# EAGLE board LabAccessDC (EAGLE 9.2.1)
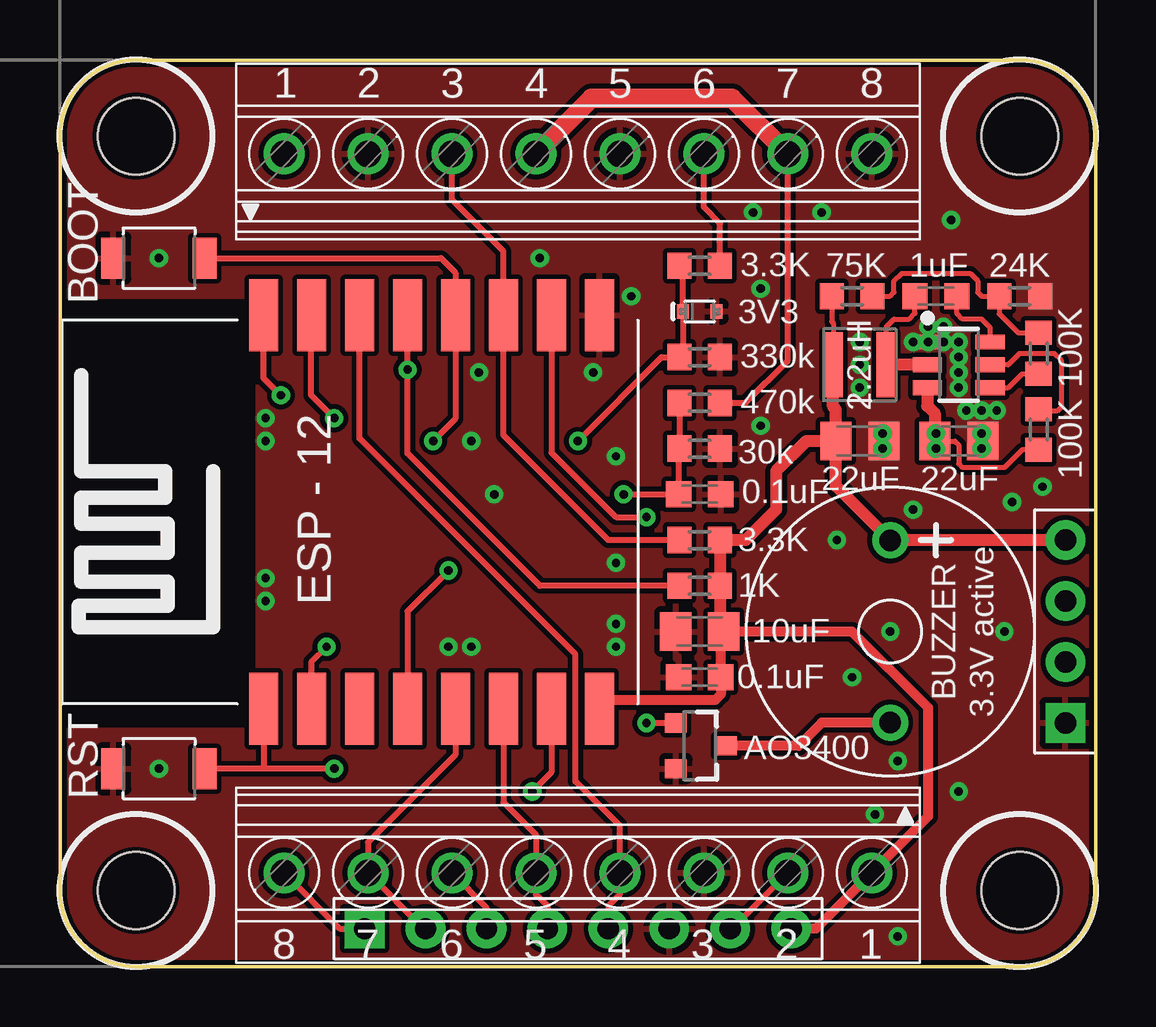
[diagram p0: board, top side]
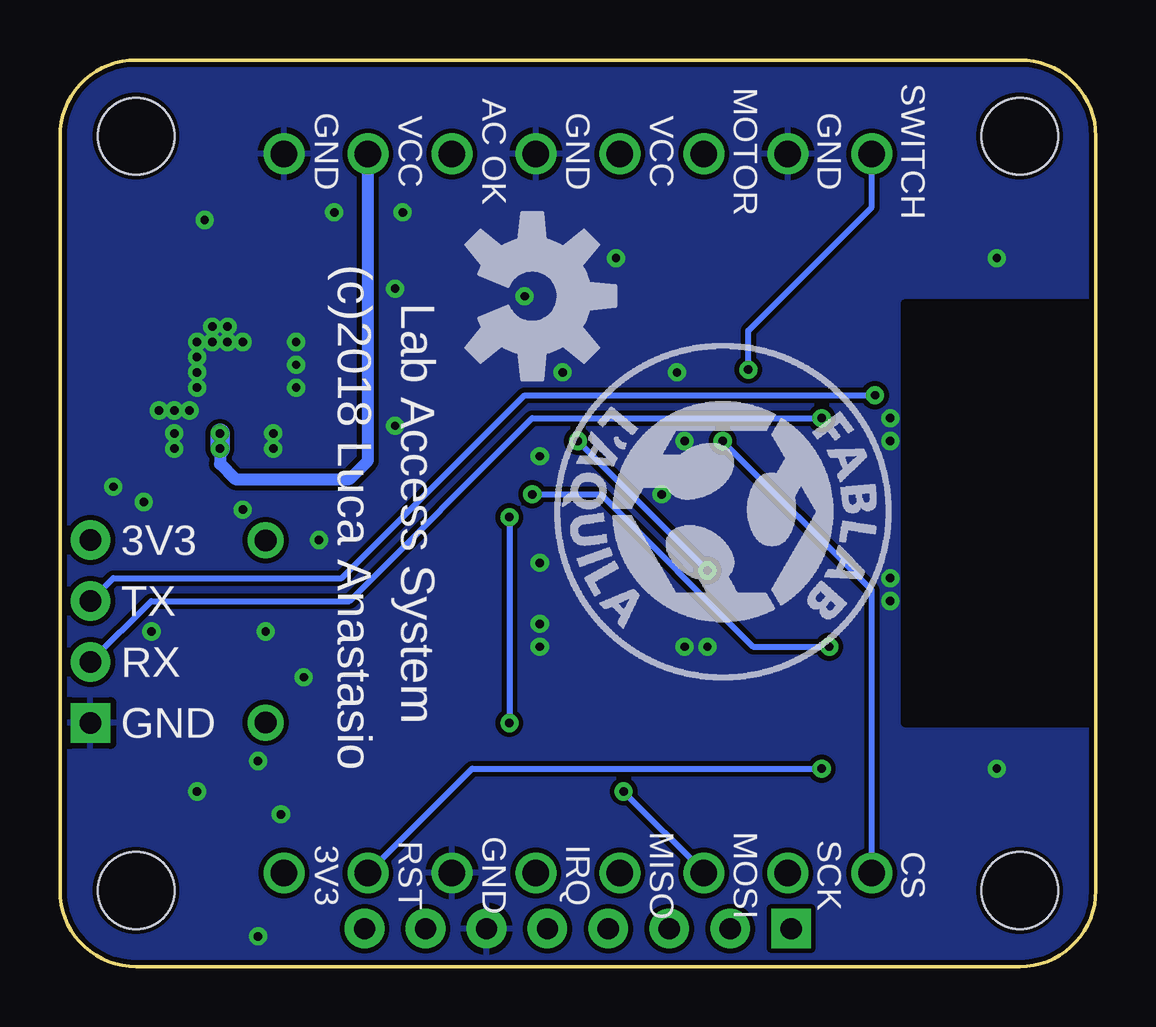
[diagram p1: board, bottom side, seen from below]

Size 43.18 x 37.78 mm. Coordinates in mm from the lower left corner, seen from the top.
Outline: 3.17,0 arc-90 0,3.17 0,34.61 arc-90 3.17,37.78 40.01,37.78 arc-90 43.18,34.61 43.18,3.17 arc-90 40.01,0 3.17,0
Copper layers (1*16): Top 0.035mm / dielectric 1.5mm / Bottom 0.035mm
Design rules "default *": minimum track width 6mil, minimum drill 0.35mm, track to track 6mil, track to pad 6mil, pad to pad 6mil, via to via 6mil, smd to smd 6mil, copper to edge 6mil, drill to drill 6mil, minimum pad ring 10mil, minimum via ring 8mil, stop-mask expansion 4mil, vias tented up to drill 20mil, thermal gap 10mil
Holes 3.2 mm at 3.17,3.17 40.01,3.17 3.17,34.61 40.01,34.61
tRestrict: area 0,10.2 to 7.9,27.6
bRestrict: area 0,10.2 to 7.9,27.6

## Footprints (pad centres in the part's own frame; a part is rotated, then mirrored left to right if it is on the bottom)
BZ2-7.6-D12.0XH6.5MM = drill 0.9 pad 1.5: + -3.8,0; - 3.8,0
C0603K = smd 1.05 x 1.08: 1 -0.875,0; 2 0.875,0
C0805K = smd 1.3 x 1.6: 1 -1,0; 2 1,0
SPARKFUN-DISCRETESEMI_SOD-523 = smd 0.5 x 0.6: A -0.7,0; C 0.7,0
H4-2.54 = drill 0.889 pad 1.651 square: 1 0,3.81 | drill 0.889 pad 1.651: 2 0,1.27; 3 0,-1.27; 4 0,-3.81
H8-2.54 = drill 0.889 pad 1.651 square: 1 0,8.89 | drill 0.889 pad 1.651: 2 0,6.35; 3 0,3.81; 4 0,1.27; 5 0,-1.27; 6 0,-3.81; 7 0,-6.35; 8 0,-8.89
TSOT-23-6 = smd 1.22 x 0.62: 1 -1.31,0.95; 2 -1.31,0; 3 -1.31,-0.95; 4 1.31,-0.95; 5 1.31,0; 6 1.31,0.95
INDUCTOR-NR3015 = smd 0.8 x 2.7: 1 -1.1,0; 2 1.1,0
SOT23-3 = smd 0.8 x 0.9: 1 -0.95,-1; 2 0.95,-1; 3 0,1.1
R0603 = smd 1 x 1.1: 1 -0.85,0; 2 0.85,0
SW2-2.6-3.0X2.5X1.2+0.4MM = smd 1 x 1.7: 1 -1.9,0; 2 1.9,0
ESP12-SMD = smd 3 x 1.2: ADC -8.3,3.8; CH_PD -8.3,1.8; GND 8.1,-8.2; GPIO0 8.1,-2.2; GPIO2 8.1,-4.2; GPIO4 8.1,1.8; GPIO5 8.1,-0.2; GPIO12 -8.3,-4.2; GPIO13 -8.3,-6.2; GPIO14 -8.3,-2.2; GPIO15 8.1,-6.2; GPIO16 -8.3,-0.2; RESET -8.3,5.8; RXD0 8.1,3.8; TXD0 8.1,5.8; VCC -8.3,-8.2
1751303 = drill 1.1 pad 1.7: 1 -12.25,-0.1; 2 -8.75,-0.1; 3 -5.25,-0.1; 4 -1.75,-0.1; 5 1.75,-0.1; 6 5.25,-0.1; 7 8.75,-0.1; 8 12.25,-0.1

## Placement (x,y rotation side)
BUZZER  3.3V active  [BZ2-7.6-D12.0XH6.5MM]  34.61,13.97 270 top
C1  0.1uF  [C0603K]  26.67,19.68 180 top
C2  10uF  [C0805K]  26.67,13.97 0 top
C3  22uF  [C0805K]  33.34,21.91 0 top
C4  1uF  [C0603K]  36.51,27.94 180 top
C6  0.1uF  [C0603K]  26.67,12.06 0 top
C7  22uF  [C0805K]  37.47,21.91 0 top
D3  3.3V  [SPARKFUN-DISCRETESEMI_SOD-523]  26.67,27.3 180 top
J1  4p-2.54  [H4-2.54]  41.91,13.97 180 top
JP1  8p-2.54  [H8-2.54]  21.59,1.59 90 top
MP1470  MP1470GJ  [TSOT-23-6]  37.47,25.08 0 top
NR3015T2R2M  2.2uH  [INDUCTOR-NR3015]  33.34,25.08 180 top
Q1  AO3400  [SOT23-3]  26.67,9.21 270 top
R3  3.3K  [R0603]  26.67,17.78 180 top
R4  3.3K  [R0603]  26.67,29.21 0 top
R5  330k  [R0603]  26.67,25.4 0 top
R6  1K  [R0603]  26.67,15.88 180 top
R8  EN  [R0603]  40.8,22.38 90 top
R9  24k  [R0603]  40.01,27.94 180 top
R10  75k  [R0603]  33.02,27.94 180 top
R11  FB  [R0603]  40.8,25.56 90 top
R12  30k  [R0603]  26.67,21.59 0 top
R13  470k  [R0603]  26.67,23.5 180 top
SW1  B3U-1000P-2P-SMD  [SW2-2.6-3.0X2.5X1.2+0.4MM]  4.13,29.53 0 top
SW2  B3U-1000P-2P-SMD  [SW2-2.6-3.0X2.5X1.2+0.4MM]  4.13,8.26 0 top
U1  [ESP12-SMD]  14.29,19.05 90 top
U$3  [OSHW-LOGO-L]  23.5,27.94 270 bottom
X2  1751303  [1751303]  21.59,33.97 0 top
X3  1751303  [1751303]  21.59,3.81 180 top

## Library data of the parts
BUZZER = Seeed-Connector; MPN: KS-12065D03YA
C1-C4 C6 C7 = rcl; SPICEPREFIX: C
D3 = LabAccessBoard; PROD_ID: DIO-11018; SPICEPREFIX: D; VOLTAGE: 3V3
J1 = Seeed-Connector; MPN: P125-1104A0BS116A1
JP1 = Seeed-Connector; MPN: P125-1108A1BS116A1
MP1470 = MP1470
NR3015T2R2M = Particle
Q1 = SparkFun-DiscreteSemi; PROD_ID: TRANS-12988
R3 R6 = resistor
R4 R5 R8-R13 = rcl; SPICEPREFIX: R
SW1 SW2 = Seeed-Switch; MPN: B3U-1000P-2P-SMD
U1 = esp8266modules
U$3 = SparkFun-Aesthetics
X2 X3 = con-phoenix-350; OC_FARNELL: unknown; OC_NEWARK: unknown

## Nets
+3V3: BUZZER.+ C2.2 C3.1 C6.2 J1.4 JP1.8 NR3015T2R2M.2 R3.1 R6.1 R10.2 U1.VCC X3.1
AC_OK: R4.2 X2.6
AC_SNS: D3.C R4.1 R5.1 U1.GPIO16
ADC: C1.2 R12.1 R13.2 U1.ADC
BUZ: Q1.1 U1.GPIO15
CS: JP1.1 SW1.2 U1.GPIO0 X3.8
EXTSW: R6.2 U1.GPIO5 X2.1
GND: C1.1 C2.1 C3.2 C6.1 C7.2 D3.A J1.1 JP1.6 MP1470.1 Q1.2 R5.2 R9.1 R12.2 SW1.1 SW2.1 U1.GND X2.2 X2.5 X2.8 X3.3
IRQ: JP1.5 U1.GPIO4 X3.4
MISO: JP1.4 U1.GPIO12 X3.5
MOSI: JP1.3 U1.GPIO13 X3.6
MOT: R3.2 U1.GPIO2 X2.3
N$1: BUZZER.- Q1.3
N$7: C4.1 MP1470.6
N$10: C4.2 MP1470.2 NR3015T2R2M.1
N$11: MP1470.5 R8.2
N$12: R9.2 R10.1 R11.2
N$13: MP1470.4 R11.1
RST: JP1.7 SW2.2 U1.RESET X3.2
RX: J1.2 U1.RXD0
SCK: JP1.2 U1.GPIO14 X3.7
TX: J1.3 U1.TXD0
VCC: C7.1 MP1470.3 R8.1 R13.1 X2.4 X2.7

## Tracks (layer width: path | path; a pad name or v marks a point on that pad's centre or on a via)
+3V3
  Top 0.2: NR3015T2R2M.2 32.24,26.82 32.17,26.89 R10.2
  Top 0.406: X3.1 31.52,1.59 JP1.8 | U1.VCC 22.85,11.11 27.3,11.11 27.55,11.35 C6.2 27.55,13.85 C2.2 | 27.52,14.12 C2.2 | X3.1 33.84,3.94 | X3.1 36.2,6.26 36.2,10.79 33.02,13.97 C2.2
  Top 0.508: C3.1 32.34,23.23 32.23,23.34 32.23,25.07 NR3015T2R2M.2 | C3.1 31.11,21.91 29.84,20.64 29.84,19.05 28.57,17.78 R3.1 R6.1 27.52,14.12 | J1.4 BUZZER.+ 32.34,20.04 C3.1
AC_OK
  Top 0.254: R4.2 27.52,30.97 26.84,31.65 X2.6
AC_SNS  (via drill 0.35)
  Top 0.254: v21.59,21.91 25.08,25.4 R5.1 25.97,25.55 D3.C 25.97,29.06 R4.1 | U1.GPIO16 14.49,14.8 v16.19,16.51
  Bottom 0.254: v21.59,21.91 v16.19,16.51
ADC  (via drill 0.35)
  Top 0.254: 25.8,23.47 R13.2 R12.1 25.8,21.57 C1.2 v23.5,19.68 | v11.11,13.34 10.48,12.7 10.48,10.76 U1.ADC
  Bottom 0.254: v23.5,19.68 20.64,19.68 14.29,13.34 v11.11,13.34
BUZ  (via drill 0.35)
  Top 0.254: Q1.1 v24.45,10.16 | U1.GPIO15 20.49,21.42 23.18,18.73 v24.45,18.73
  Bottom 0.254: v24.45,18.73 v24.45,10.16
CS  (via drill 0.35)
  Top 0.254: X3.8 11.66,1.59 JP1.1 | v15.56,21.91 16.49,22.84 U1.GPIO0 16.49,28.91 15.88,29.53 SW1.2
  Bottom 0.254: X3.8 9.34,15.69 v15.56,21.91
EXTSW  (via drill 0.35)
  Top 0.254: R6.2 20,15.88 14.49,21.39 v14.49,24.88 U1.GPIO5
  Bottom 0.254: v14.49,24.88 14.49,26.5 9.34,31.65 X2.1
GND  (via drill 0.35)
  other vias: 36.2,26.67 35.56,26.04 36.2,26.04 36.83,26.04 34.29,21.59 38.42,21.59 36.83,26.67 37.47,26.04 34.29,22.23 38.42,22.23 37.47,25.4 37.47,24.77 37.47,24.13 37.78,23.18 33.34,26.04 33.34,25.08 33.34,24.13 38.42,23.18 39.05,23.18 23.18,13.34 23.18,14.29 32.38,17.78 33.02,12.06 23.18,16.83 18.1,19.68 17.14,21.91 34.61,13.97 39.37,13.97 39.69,19.37 40.96,20 35.56,19.05 17.46,24.77 22.23,24.77 20,29.53 8.57,22.86 8.57,15.24 8.57,16.19 8.57,21.91 37.47,7.3 34.92,1.27 33.97,6.35 34.92,8.57 23.18,21.27 16.19,13.34 17.14,13.34 4.13,8.26 4.13,29.53 28.89,31.43 29.21,22.54 31.75,31.43 37.15,31.11 23.81,27.94 29.21,28.26
  pour Top (isolate 0.2): 3.17,0 arc-90 0,3.17 0,10.16 7.94,10.16 7.94,27.62 0,27.62 0,34.61 arc-90 3.17,37.78 40.01,37.78 arc-90 43.18,34.61 43.18,3.17 arc-90 40.01,0
  pour Bottom (isolate 0.2): 3.17,37.78 40.01,37.78 arc-90 43.18,34.61 43.18,3.17 arc-90 40.03,0.02 3.21,-0.03 arc-90 0,3.17 0,10.16 7.94,10.16 7.94,27.62 0,27.62 0,34.61 arc-90
  pour Top (isolate 0.2, no thermals): 30.48,29.84 42.86,29.84 42.86,19.68 30.48,19.68
  pour Bottom (isolate 0.2): 30.48,29.84 42.86,29.84 42.86,19.68 30.48,19.68
IRQ
  Top 0.254: JP1.5 22.86,2.54 23.34,3.02 X3.4 23.34,5.87 21.49,7.72 21.49,13.02 12.49,22.02 U1.GPIO4
MISO
  Top 0.254: JP1.4 20.32,2.54 19.84,3.02 X3.5 19.84,5.5 18.49,6.85 U1.GPIO12
MOSI  (via drill 0.35)
  Top 0.254: X3.6 17.78,2.47 JP1.3 | U1.GPIO13 20.49,8.11 v19.68,7.3
  Bottom 0.254: v19.68,7.3 16.34,3.96 X3.6
MOT
  Top 0.254: R3.2 22.86,17.78 18.49,22.15 U1.GPIO2 18.49,29.82 16.34,31.97 X2.3
N$1
  Top 0.406: BUZZER.- 31.76,10.17 30.8,9.21 Q1.3
N$7
  Top 0.2: MP1470.6 38.77,26.63 38.42,26.99 37.62,26.99 37.39,27.22 C4.1
N$10
  Top 0.2: NR3015T2R2M.1 34.45,25.09 34.45,26.67 34.77,26.99 35.4,26.99 35.64,27.22 C4.2
  Top 0.508: MP1470.2 NR3015T2R2M.1
N$11
  Top 0.2: MP1470.5 39.53,25.08 40.01,25.56 41.43,25.56 41.75,25.24 41.75,23.34 41.59,23.18 40.85,23.18 R8.2
N$12
  Top 0.2: R11.2 39.95,26.41 39.16,27.2 R9.2 38.42,27.94 38.26,28.1 38.26,28.57 37.94,28.89 35.08,28.89 34.77,28.57 34.77,28.1 34.61,27.94 R10.1
N$13
  Top 0.2: MP1470.4 39.53,24.13 40.11,24.71 R11.1
RST  (via drill 0.35)
  Top 0.254: X3.2 28.02,1.59 JP1.7 | U1.RESET 8.49,8.26 v11.43,8.26 SW2.2
  Bottom 0.254: v11.43,8.26 26,8.26 X3.2
RX  (via drill 0.35)
  Top 0.254: U1.RXD0 10.48,27.14 10.48,23.81 v11.43,22.86
  Bottom 0.254: J1.2 39.37,15.24 31.11,15.24 23.5,22.86 v11.43,22.86
SCK
  Top 0.254: JP1.2 15.16,1.59 X3.7 12.84,5.18 16.49,8.83 U1.GPIO14
TX  (via drill 0.35)
  Top 0.254: v9.21,23.81 8.49,24.53 U1.TXD0
  Bottom 0.254: J1.3 40.96,16.19 31.43,16.19 23.81,23.81 v9.21,23.81
VCC  (via drill 0.35)
  Top 0.2: R8.1 40.11,21.53 39.37,20.8 37.62,20.8 37.47,20.95 37.47,21.75 37.31,21.91 C7.1
  Top 0.254: R13.1 28.57,23.5 30.34,25.26 X2.7 | C7.1 36.51,21.95 v36.51,22.23
  Top 0.508: MP1470.3 36.16,23.38 36.47,23.07 C7.1
  Top 0.813: X2.7 28.02,36.2 22.16,36.2 X2.4
  Bottom 0.508: v36.51,21.59 36.51,20.95 35.88,20.32 31.11,20.32 30.34,21.09 X2.7
  Bottom 0.813: v36.51,21.59 v36.51,22.23

## Text on the board
tPlace: 75K | 1uF | 24K | BOOT | 100K | 100K | 22uF | 22uF | RST
bPlace: SWITCH | GND | MOTOR | VCC | GND | AC OK | VCC | GND | Lab Access System | (c)2018 Luca Anastasio | 3V3 | TX | RX | GND | CS | SCK | MOSI | MISO | IRQ | GND | RST | 3V3
tNames: 2.2uH